# Altium PCB TPA3116(50W).pcbdoc
Units mil, origin at the board's own origin, x right, y up, seen from the top; angles counter-clockwise.
Board outline 2980 x 3868.95 mil, 2 copper layers (Top Layer, Bottom Layer); 36 components, 33 nets, 128 pads, 71 vias.
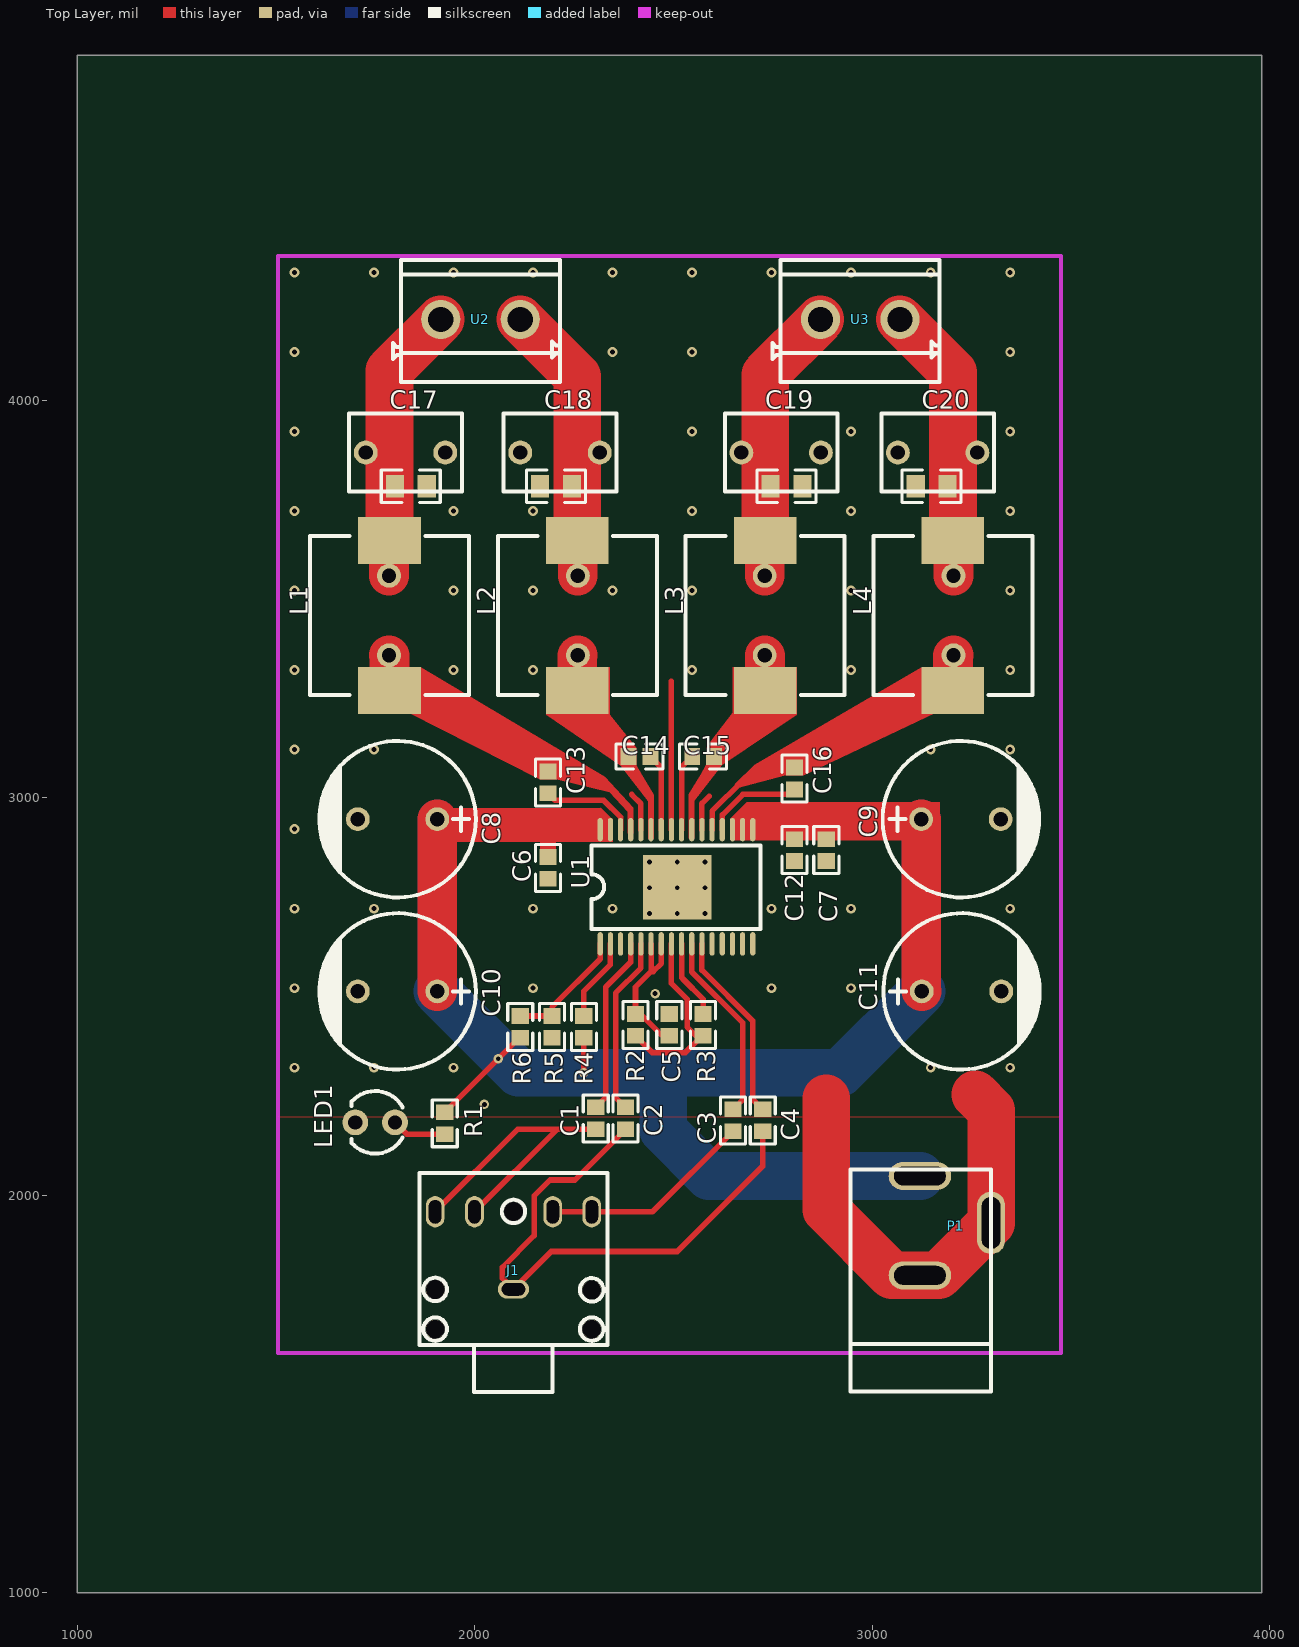
[diagram p0: Top Layer view]
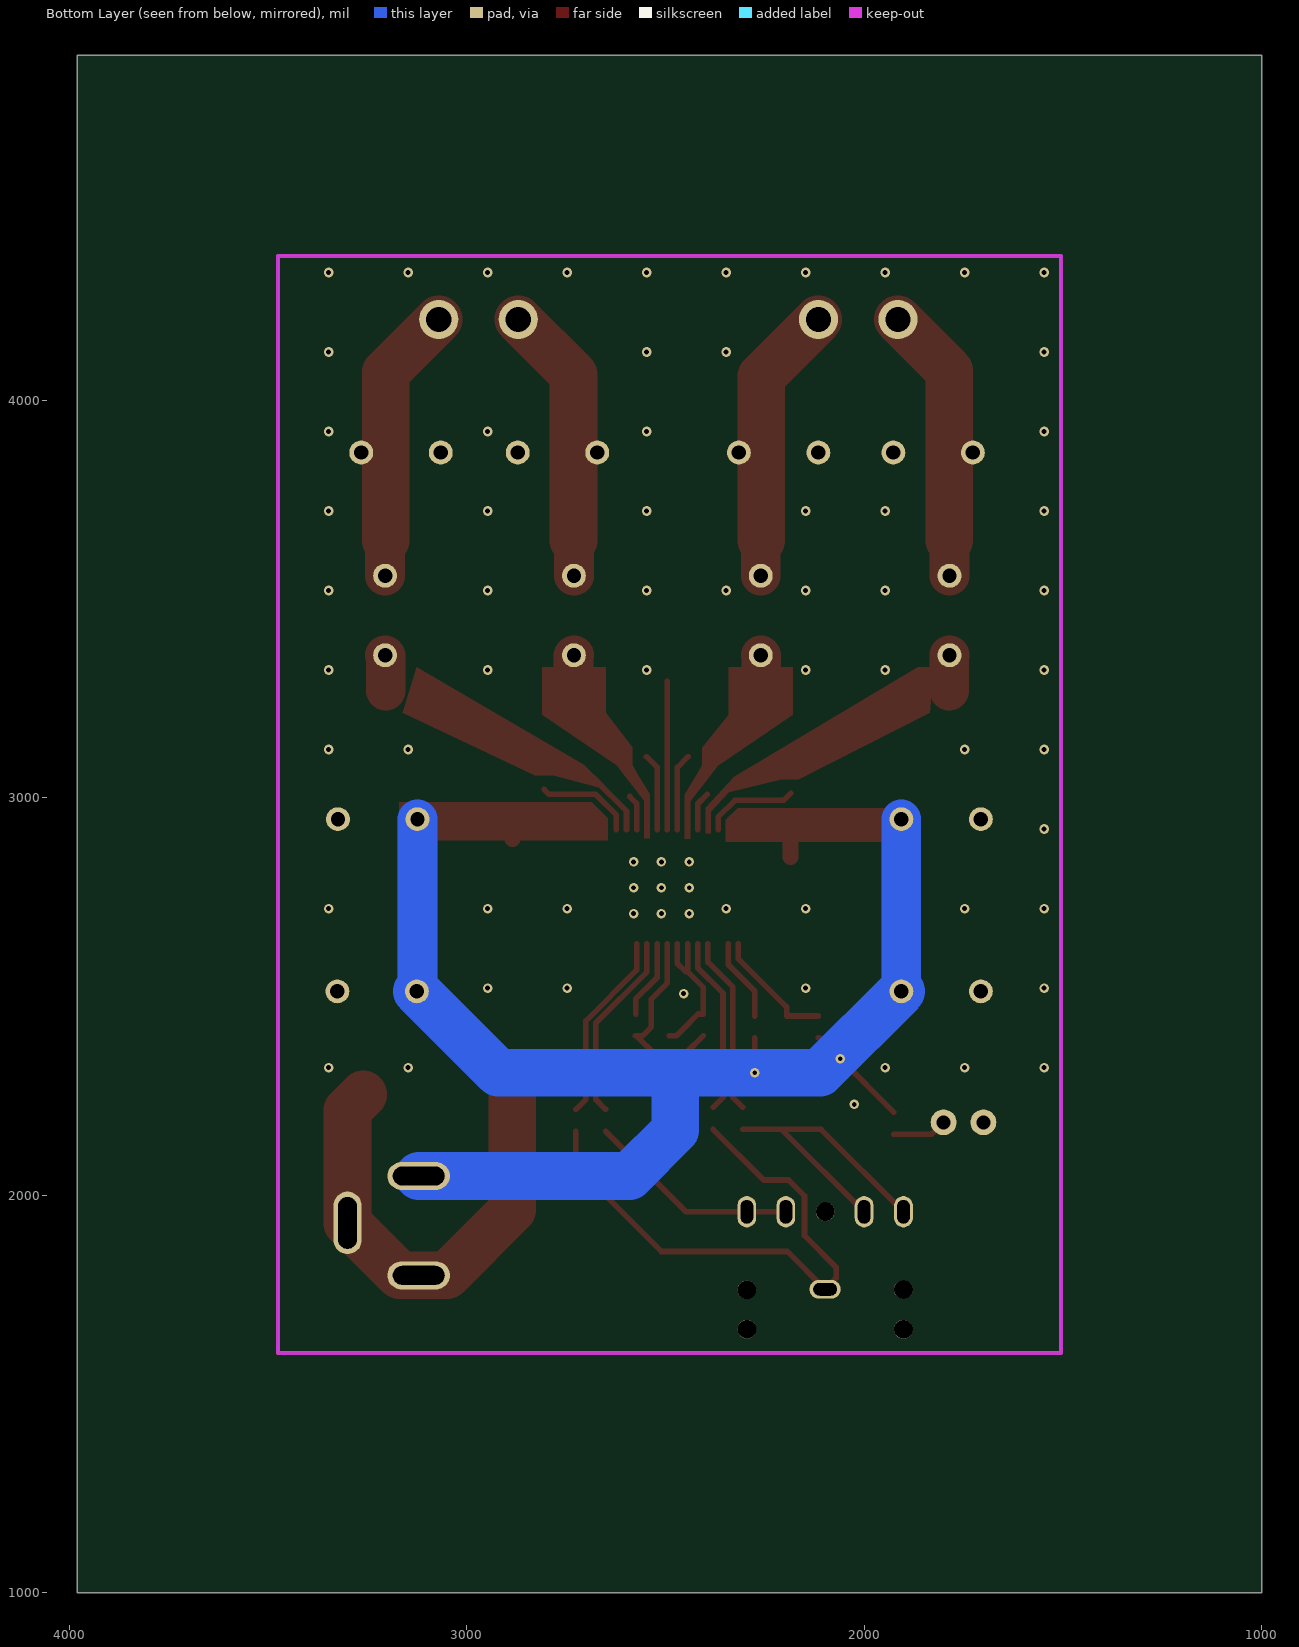
[diagram p1: Bottom Layer view, seen from below]

## Layer stack, top to bottom
Top Layer: signal copper (thickness not stored)
Dielectric: dielectric 12.6, FR-4, Dk 4.8
Bottom Layer: signal copper (thickness not stored)

## Board outline
3980,1000 1000,1000 1000,4868.95 3980,4868.95

## Components (designator, comment, footprint, x,y, rotation, side; value= is the part's Value field where it differs from the comment)
C1 "1u" 0603 2305,2193.95 r270 top
C2 "1u" 0603 2380,2193.95 r270 top
C3 "1u" 0603 2650,2188.95 r270 top
C4 "1u" 0603 2725,2188.95 r270 top
C5 "0.1uF" 0603 2490,2428.95 r90 top
C6 "0.1uF" 0603 2185,2823.95 r270 top
C7 "0.1uF" 0603 2885,2868.95 r270 top
C8 "1000uF" CAP-D10.0XF5.0 1806.3,2946.55 r180 top
C9 "1000uF" CAP-D10.0XF5.0 3223.6,2946.55 r0 top
C10 "1000uF" CAP-D10.0XF5.0 1806.3,2513.45 r180 top
C11 "1000uF" CAP-D10.0XF5.0 3225,2513.45 r0 top
C12 "0.1uF" 0603 2805,2868.95 r270 top
C13 "220n" 0603 2185,3038.95 r270 top
C14 "220n" 0603 2415,3103.95 r0 top
C15 "220n" 0603 2575,3103.95 r180 top
C16 "220n" 0603 2805,3048.95 r270 top
C17 "1uF" CAP-7.2*5.0 1826.4,3868.95 r180 top
C18 "1uF" CAP-7.2*5.0 2215,3868.95 r180 top
C19 "1uF" CAP-7.2*5.0 2771.3,3868.95 r180 top
C20 "1uF" CAP-7.2*5.0 3165,3868.95 r180 top
J1 "PJ-307C" AUDIO-PJ307C 2097.97,1811.44 r180 top
L1 "10uH" 1040 1786.09,3459 r90 top
L2 "10uH" 1040 2258.53,3459 r90 top
L3 "10uH" 1040 2730.97,3459 r90 top
L4 "10uH" 1040 3203.41,3459 r90 top
LED1 "3MM" LED-3MM/2.54 1749.97,2184 r270 top
P1 "DC-005" DC-005 3210,1923.95 r90 top
R1 "25k" 0603 1925,2181.55 r270 top
R2 "100K" 0603 2405,2428.95 r90 top
R3 "20K" 0603 2575,2428.95 r270 top
R4 "100k" 0603 2275,2423.95 r270 top
R5 "0R" 0603 2195,2423.95 r270 top
R6 "100k" 0603 2115,2423.95 r270 top
U1 "TPA3116D2DAD" HTSSOP-32-EP 2318.1,2631.55 r90 top
U2 "DB301V-5.0-2P" CONN-TH_2PIN-V-PITCH5.00-L_JL126-50002G01 2015,4203.95 r0 top
U3 "DB301V-5.0-2P" CONN-TH_2PIN-V-PITCH5.00-L_JL126-50002G01 2970,4203.95 r0 top

## Footprints (in the part's own frame and the unit in brackets; to place one, negate y for a bottom-side part, rotate by r counter-clockwise, add the part's x,y. Pads: shape width x height; smd on the part's side, far side on the other; paste and mask are expansions set on the pad)
0603 [mm]
  rect 1x1.1 smd: 1(-0.7,0) 2(0.7,0)
  silkscreen extent -1.5,-0.8 1.5,0.8
1040 [mm]
  rect 3x4 smd: 1(-4.8,0) 2(4.8,0)
  silkscreen extent -5.08,-5.08 5.08,5.08
AUDIO-PJ307C [mm]
  round 1.2 hole 1.2: 0(-5,3.759) 0(-5,1.245) 0(0,-3.759) 0(5,3.759) 0(5,1.219)
  oval 2x1.2 hole 0.8 slot 1.5 at 0 deg copper offset 0,0: 1(0,1.205)
  oval 1.2x2 hole 0.8 slot 1.5 at 90 deg copper offset 0,0: 2(5.004,-3.748) 3(2.489,-3.748) 4(-2.511,-3.748) 5(-5.004,-3.748)
  silkscreen extent -6.01,-6.24 5.99,7.78
CAP-7.2*5.0 [mil]
  round 60 hole 36: 1(-100,0) 2(100,0)
  silkscreen extent -142,-98 142,98
CAP-D10.0XF5.0 [mil]
  round 60 hole 36: 1(-100,0) 2(100,0)
  silkscreen extent -197,-197 200,197
CONN-TH_2PIN-V-PITCH5.00-L_JL126-50002G01 [mm]
  round 2.5 hole 1.6: 1(-2.54,0) 2(2.54,0)
  silkscreen extent -5.59,-4 5.08,3.8
DC-005 [mm]
  oval 1.8x4 hole 1.2 slot 3.3 at 90 deg: 1(3.175,2.273) 2(-3.175,2.273)
  oval 4x1.8 hole 1.2 slot 3.3 at 0 deg: 3(0.178,-2.273)
  silkscreen extent -10.59,-2.28 3.58,6.73
HTSSOP-32-EP [mm]
  oval 1.497x0.33 smd: 1(0.033,0.048) 2(0.033,-0.602) 3(0.033,-1.252) 4(0.033,-1.9) 5(0.033,-2.55) 6(0.033,-3.2) 7(0.033,-3.851) 8(0.033,-4.501) 9(0.033,-5.151) 10(0.033,-5.801) 11(0.033,-6.452) 12(0.033,-7.102) 13(0.033,-7.752) 14(0.033,-8.4) 15(0.033,-9.05) 16(0.033,-9.7) 17(7.333,-9.7) 18(7.333,-9.05) 19(7.333,-8.4) 20(7.333,-7.752) 21(7.333,-7.102) 22(7.333,-6.452) 23(7.333,-5.801) 24(7.333,-5.151) 25(7.333,-4.501) 26(7.333,-3.851) 27(7.333,-3.2) 28(7.333,-2.55) 29(7.333,-1.9) 30(7.333,-1.252) 31(7.333,-0.602) 32(7.333,0.048)
  rect 4.11x4.36 smd: 33(3.658,-4.877)
  silkscreen extent 0.99,-10.19 6.32,0.61
LED-3MM/2.54 [mil]
  round 65 hole 35.43: 1(0,50) 2(0,-50)
  silkscreen extent -79,-59 79,69

## Free pads (board coordinates)
  round 60 hole 36: 1(1784.97,3359) 1(2259.97,3359) 1(2729.97,3359) 1(3204.97,3359) 2(1784.97,3559) 2(2259.97,3559) 2(2729.97,3559) 2(3204.97,3559)
  rect 45.67x57.09 smd: 1(1799.97,3784) 1(2164.97,3784) 1(2744.97,3784) 1(3109.97,3784) 2(1879.97,3784) 2(2244.97,3784) 2(2824.97,3784) 2(3189.97,3784)

## Via types
v1: diameter 24, hole 12, Top Layer to Bottom Layer, 71 vias

## Nets (pads, with @x,y where several pads share a name; then routed paths per layer and width w, separated by ;. In a path a pad name is that pad's centre, name@x,y a point inside that pad or via, vN(x,y) a via of type N, cw(c..) or ccw(c..) an arc to the next point about the centre after c; other vN are vias at no path point)
C1_1: C1.1 U1.4 | length 447.7
  Top Layer w14: C1.1@2305,2221.55 2330,2246.45 2330,2523.95 2392.9,2586.95 U1.4
C2_1: C2.1 U1.5 | length 448
  Top Layer w14: C2.1 2354.97,2246.55 2354.97,2509 2418.5,2572.53 U1.5
C3_1: C3.1 U1.10 | length 479.9
  Top Layer w14: U1.10 2546.5,2562.45 2675,2433.95 2675,2241.45 C3.1@2650,2216.55
C4_1: C4.1 U1.11 | length 479.7
  Top Layer w14: U1.11 2572.1,2566.86 2699.97,2439 2699.97,2241.55 C4.1
C13_2: C13.2 U1.30 | length 238.5
  Top Layer w14: C13.2 2202.4,2994 2324.97,2994 2367.4,2951.57 U1.30
C14_2: C14.2 U1.26 | length 194.9
  Top Layer w14: C14.2 2469.7,3076.81 U1.26
GND: C2.2 C4.2 C5.2 C6.2 C7.2 C8.2 C9.2 C10.2 C11.2 C12.2 C17.1 C18.2 C19.1 C20.2 J1.1 LED1.2 P1.2 P1.3 pad.1@2164.97,3784 pad.1@3109.97,3784 pad.2@1879.97,3784 pad.2@2824.97,3784 R3.1 R5.2 U1.9 U1.12 U1.13 U1.14 U1.15 U1.22 U1.25 U1.28 U1.33 | length 3341
  Top Layer w14: J1.1 2192.97,1859 2509.97,1859 2724.97,2074 C4.2 ; J1.1 2070,1791.95 2070,1818.95 2150,1898.95 2150,1998.95 2190,2038.95 2252.5,2038.95 C2.2@2380,2166.45 ; 2394.97,3009 2418.48,2985.49 U1.28 ; U1.25 2495.3,3293.95 ; U1.9 2520.88,2548.09 2524.97,2544 2574.97,2494 R3.1@2574.97,2456.56 ; U1.22 2572.08,2986.11 2589.97,3004
  Top Layer w120: 2884.97,2244 2884.97,1964 3050.01,1798.95 P1.2 3167.5,1798.95 P1.3 3299.5,2214.47 3259.97,2254
  other v1: 2024.97,2228.99 1547.1,2321.85 1747.1,2321.85 1947.1,2321.85 3147.1,2321.85 3347.1,2321.85 2454.26,2508.02 1547.1,2521.85 2147.1,2521.85 2747.1,2521.85 2947.1,2521.85 2439.97,2708.99 2509.97,2708.99 2579.97,2708.99 1547.1,2721.85 1747.1,2721.85 2147.1,2721.85 2347.1,2721.85 2747.1,2721.85 2947.1,2721.85 3347.1,2721.85 2439.97,2773.99 2509.97,2773.99 2579.97,2773.99 2439.97,2838.99 2509.97,2838.99 2579.97,2838.99 1547.1,2921.85 1547.1,3121.85 1747.1,3121.85 3147.1,3121.85 3347.1,3121.85 1547.1,3321.85 1947.1,3321.85 2147.1,3321.85 2547.1,3321.85 2947.1,3321.85 3347.1,3321.85 1547.1,3521.85 1947.1,3521.85 2147.1,3521.85 2347.1,3521.85 2547.1,3521.85 2947.1,3521.85 3347.1,3521.85 1547.1,3721.85 1947.1,3721.85 2147.1,3721.85 2547.1,3721.85 2947.1,3721.85 3347.1,3721.85 1547.1,3921.85 2547.1,3921.85 2947.1,3921.85 3347.1,3921.85 1547.1,4121.85 2347.1,4121.85 2547.1,4121.85 3347.1,4121.85 1547.1,4321.85 1747.1,4321.85 1947.1,4321.85 2147.1,4321.85 2347.1,4321.85 2547.1,4321.85 2747.1,4321.85 2947.1,4321.85 3147.1,4321.85 3347.1,4321.85
L1_1: C13.1 L1.1 pad.1@1784.97,3359 U1.29 | length 89.4
  Top Layer w100: pad.1@1784.97,3359 1786.09,3357.88 L1.1
L1_2: C17.2 L1.2 pad.1@1799.97,3784 pad.2@1784.97,3559 U2.1 | length 698.8
  Top Layer w100: pad.2@1784.97,3559 1784.97,3646.85 L1.2
  Top Layer w120: L1.2 1786.09,4075.04 U2.1
L2_1: C14.1 L2.1 pad.1@2259.97,3359 U1.27 | length 89.6
  Top Layer w100: L2.1 2258.53,3357.56 pad.1@2259.97,3359
L2_2: C18.1 L2.2 pad.2@2244.97,3784 pad.2@2259.97,3559 U2.2 | length 704.4
  Top Layer w100: pad.2@2259.97,3559 L2.2@2259.97,3647.97
  Top Layer w120: U2.2 2258.53,4060.42 L2.2
L3_1: C15.1 L3.1 pad.1@2729.97,3359 U1.23 | length 89.4
  Top Layer w100: pad.1@2729.97,3359 2730.97,3357.99 L3.1
L3_2: C19.2 L3.2 pad.1@2744.97,3784 pad.2@2729.97,3559 U3.1 | length 703
  Top Layer w100: pad.2@2729.97,3559 2729.97,3646.97 L3.2
  Top Layer w120: L3.2 2730.97,4064.92 U3.1
L4_1: C16.1 L4.1 pad.1@3204.97,3359 U1.21 | length 388.9
  Top Layer w14: U1.21 2597.68,2966.71 2674.97,3044 2707.53,3076.56 C16.1@2804.97,3076.56
  Top Layer w100: L4.1 3203.41,3357.44 pad.1@3204.97,3359
L4_2: C20.1 L4.2 pad.2@3189.97,3784 pad.2@3204.97,3559 U3.2 | length 700.9
  Top Layer w100: L4.2 3204.97,3646.42 pad.2@3204.97,3559
  Top Layer w120: U3.2 3203.41,4070.54 L4.2
LED1_1: LED1.1 R1.2 | length 137.4
  Top Layer w14: LED1.1 1829.97,2154 R1.2
LP: C3.2 J1.4 J1.5 | length 537
  Top Layer w14: J1.4 2447.52,1959 C3.2
null: 
PVCC: C6.1 C7.1 C8.1 C9.1 C10.1 C11.1 C12.1 P1.1 R1.1 R4.2 R6.2 U1.17 U1.18 U1.19 U1.31 U1.32 | length 4458.8
  Top Layer w14: R1.1 v1(2059.91,2344.05) 2112.26,2396.4 R6.2 ; v1(2274.97,2308.99) R4.2
  Top Layer w40: C6.1@2184.97,2851.56 2184.97,2922 2189.97,2927 ; C7.1@2884.97,2896.56 2884.97,2963
  Top Layer w100: C10.1@1906.27,2513.45 C8.1@1906.27,2946.52 ; C9.1@3123.59,2946.51 3123.59,2514.82 C11.1@3124.97,2513.44
  Bottom Layer w100: C10.1 C8.1 ; C9.1 3123.6,2514.85 C11.1
  Bottom Layer w120: C10.1 2110.8,2308.95 2920.5,2308.95 C11.1 ; 2474.97,2308.95 2474.97,2164 2590.01,2048.95 P1.1
R2_1: R2.1 R3.2 U1.8 | length 475.1
  Top Layer w14: R2.1 2447.4,2359 2529.97,2359 2567.47,2396.5 R3.2@2567.47,2401.35 ; U1.8 2495.3,2533.65 2535,2493.95 2535,2423.95 2557.6,2401.35 R3.2
R2_2: C5.1 R2.2 U1.6 U1.7 | length 383.7
  Top Layer w14: U1.6 2444.1,2563.15 ; U1.7 2470,2583.95 2449.1,2563.15 2444.1,2563.15 ; C5.1 2472.57,2401.39 2454.97,2419 2417.41,2456.55 2405,2456.55 2405,2524.05 2444.1,2563.15
R4_1: R4.1 U1.2 | length 208.9
  Top Layer w14: R4.1@2275,2451.55 2275,2513.95 2341.8,2580.85 U1.2
R6_1: R5.1 R6.1 U1.1 | length 311.5
  Top Layer w14: R6.1 R5.1 ; R5.1@2195,2451.55 2195,2474.05 2316.2,2595.25 U1.1
RP: C1.2 J1.2 J1.3 | length 880.9
  Top Layer w14: J1.2 2108.41,2166.44 C1.2 2207.41,2166.44 J1.3
S$26: 
S$28: 
S$30: 
S$67: 
S$69: 
U1_3: U1.3
U1_16: U1.16
U1_20: C16.2 U1.20 | length 245.3
  Top Layer w14: U1.20 2623.3,2957.35 2675,3008.95 2792.5,3008.95 C16.2@2805,3021.45
U1_24: C15.2 U1.24 | length 194.7
  Top Layer w14: U1.24 2520.88,3077.46 C15.2
pads on no net: J1.0

## Polygon pours and split planes (outlines as drawn)
GND on Bottom Layer (solid): 1504.97,4364 3473.47,4364 3473.47,1608.09 1504.97,1608.09
GND on Top Layer (solid): 1504.97,4364 1504.97,2198.64 3473.47,2198.64 3473.47,4364

## Other copper
Top Layer:
  region net L2_1: 2436.97,2898 2450.97,2898 2450.97,3007.99 2420.97,3058 2406.97,3082 2406.97,3126 2339.97,3208.99 2339.97,3328.99 2179.97,3328.99 2179.97,3208.99 2367.97,3081 2436.97,2992
  region net L3_1: 2552.97,2899 2538.97,2899 2538.97,3008.99 2568.97,3059 2582.97,3083 2582.97,3127 2649.97,3213.99 2649.97,3328.99 2809.97,3328.99 2809.97,3208.99 2621.97,3082 2552.97,2993
  region net L4_1: 3124.97,3328.99 3159.97,3213.99 2825.97,3056 2782.97,3057 2659.97,3023.99 2654.97,3034 2704.97,3084
  region net L1_1: 1824.97,3328.99 1834.97,3213.99 2163.97,3047 2205.97,3047 2339.97,3013.99 2385.97,2965 2385.97,2911 2398.97,2911 2398.97,2975 2326.97,3053 1864.97,3328.99
  region net PVCC: 2347.97,2890 2347.97,2945 2316.97,2974.99 1911.97,2973.99 1932.97,2890
  region net PVCC: 2644.97,2894 2644.97,2949 2684.97,2989 2904.97,2989 3169.97,2989 3169.97,2894

## Silkscreen, mask and mechanical layers (free items; w line width, h text height)
Top Overlay:
  lines w7.87: 1817.24,3743.26 1765.27,3743.26 1765.27,3824.76 1817.24,3824.76 ; 1861.81,3743.26 1913.78,3743.26 1913.78,3824.76 1861.81,3824.76 ; 2182.24,3743.26 2130.27,3743.26 2130.27,3824.76 2182.24,3824.76 ; 2226.81,3743.26 2278.78,3743.26 2278.78,3824.76 2226.81,3824.76 ; 2762.24,3743.26 2710.27,3743.26 2710.27,3824.76 2762.24,3824.76 ; 2806.81,3743.26 2858.78,3743.26 2858.78,3824.76 2806.81,3824.76 ; 3127.24,3743.26 3075.27,3743.26 3075.27,3824.76 3127.24,3824.76 ; 3171.81,3743.26 3223.78,3743.26 3223.78,3824.76 3171.81,3824.76
Document:
  lines w0.1: 2489,2933.48 2491,2935.48